# Altium PCB acqboard 3.0.PcbDoc (part 4 of 4)
Units mil, origin at the board's own origin, x right, y up, seen from the top; angles counter-clockwise.
Board outline 6000 x 4000 mil, 4 copper layers (Top Layer, Internal Plane 1, Internal Plane 2, Bottom Layer); 450 components, 328 nets, 1980 pads, 745 vias.
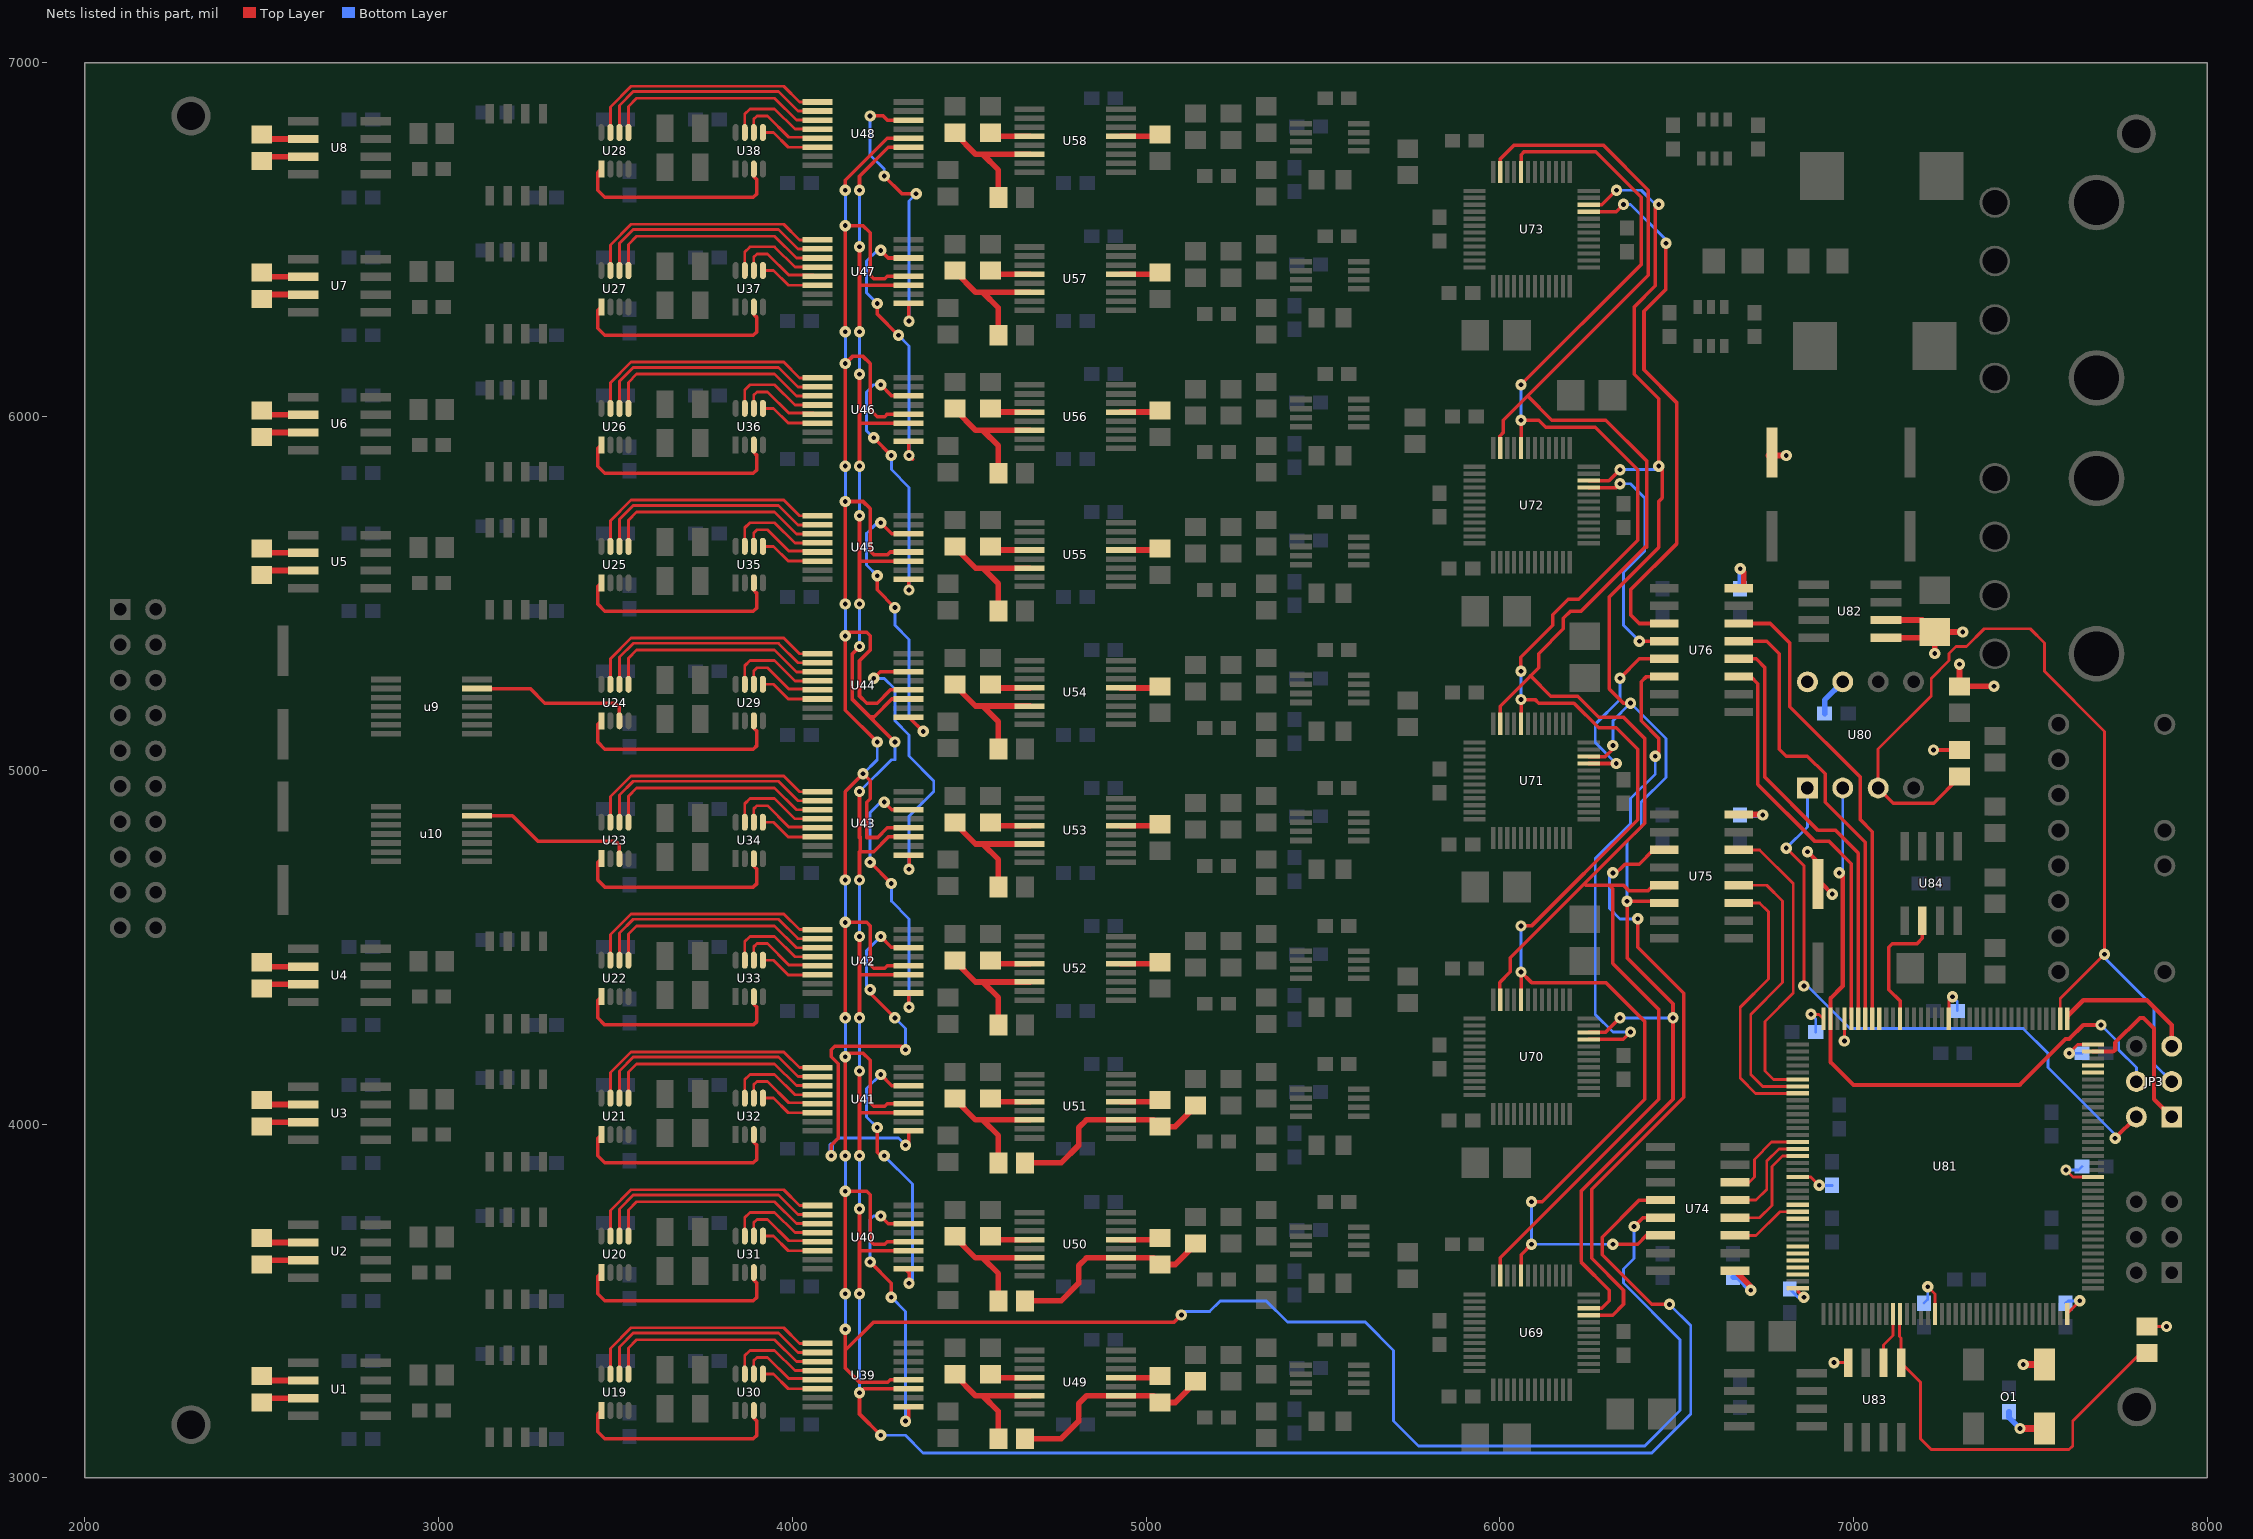
[diagram p6: the nets of this part, all layers, seen from the top]

## Via types
v1: diameter 32, hole 13.5, Top Layer to Bottom Layer, 745 vias

## Nets (pads, with @x,y where several pads share a name; then routed paths per layer and width w, separated by ;. In a path a pad name is that pad's centre, name@x,y a point inside that pad or via, vN(x,y) a via of type N, cw(c..) or ccw(c..) an arc to the next point about the centre after c; other vN are vias at no path point) (continued)
NetR12.AA8_2: R41.2 R59.2 R69.2 U51.11 | length 596.5
  Top Layer w16: R41.2@4657.4,3890 4760,3890 4810,3940 4810,3990 4831.61,4011.61 5020.98,4011.61 R59.2@5040,3992.6 5082.6,3992.6 5140,4050 R69.2@5140,4052.6
NetR12.AA9_2: R39.2 R58.2 R68.2 U50.11 | length 596.5
  Top Layer w16: R39.2@4657.4,3500 4760,3500 4810,3550 4810,3600 4831.61,3621.61 5020.98,3621.61 R58.2@5040,3602.6 5082.6,3602.6 5140,3660 R68.2@5140,3662.6
NetR12.AA10_2: R37.2 R57.2 R67.2 U49.11 | length 596.5
  Top Layer w16: R37.2@4657.4,3110 4760,3110 4810,3160 4810,3210 4831.61,3231.61 5020.98,3231.61 R57.2@5040,3212.6 5082.6,3212.6 5140,3270 R67.2@5140,3272.6
NetR13.AA1_2: R56.2 U58.4 | length 115.1
  Top Layer w16: R56.2@4560,6802.6 4569.8,6792.8 U58.4@4671.06,6792.8
NetR13.AA2_2: R54.2 U57.4 | length 115.1
  Top Layer w16: R54.2@4560,6412.6 4569.8,6402.8 U57.4@4671.06,6402.8
NetR13.AA3_2: R52.2 U56.4 | length 115.1
  Top Layer w16: R52.2@4560,6022.6 4569.8,6012.8 U56.4@4671.06,6012.8
NetR13.AA4_2: R50.2 U55.4 | length 115.1
  Top Layer w16: R50.2@4560,5632.6 4569.8,5622.8 U55.4@4671.06,5622.8
NetR13.AA5_2: R48.2 U54.4 | length 115.1
  Top Layer w16: R48.2@4560,5242.6 4569.8,5232.8 U54.4@4671.06,5232.8
NetR13.AA6_2: R46.2 U53.4 | length 115.1
  Top Layer w16: R46.2@4560,4852.6 4569.8,4842.8 U53.4@4671.06,4842.8
NetR13.AA7_2: R44.2 U52.4 | length 115.1
  Top Layer w16: R44.2@4560,4462.6 4569.8,4452.8 U52.4@4671.06,4452.8
NetR13.AA8_2: R42.2 U51.4 | length 115.1
  Top Layer w16: R42.2@4560,4072.6 4569.8,4062.8 U51.4@4671.06,4062.8
NetR13.AA9_2: R40.2 U50.4 | length 115.1
  Top Layer w16: R40.2@4560,3682.6 4569.8,3672.8 U50.4@4671.06,3672.8
NetR13.AA10_2: R38.2 U49.4 | length 115.1
  Top Layer w16: R38.2@4560,3292.6 4569.8,3282.8 U49.4@4671.06,3282.8
NetR14.AA1_1: R66.1 U58.13 | length 113
  Top Layer w16: U58.13@4928.94,6792.8 5035.39,6792.8 R66.1@5040,6797.4
NetR14.AA2_1: R65.1 U57.13 | length 113
  Top Layer w16: U57.13@4928.94,6402.8 5035.39,6402.8 R65.1@5040,6407.4
NetR14.AA3_1: R64.1 U56.13 | length 113
  Top Layer w16: U56.13@4928.94,6012.8 5035.39,6012.8 R64.1@5040,6017.4
NetR14.AA4_1: R63.1 U55.13 | length 113
  Top Layer w16: U55.13@4928.94,5622.8 5035.39,5622.8 R63.1@5040,5627.4
NetR14.AA5_1: R62.1 U54.13 | length 113
  Top Layer w16: U54.13@4928.94,5232.8 5035.39,5232.8 R62.1@5040,5237.4
NetR14.AA6_1: R61.1 U53.13 | length 113
  Top Layer w16: U53.13@4928.94,4842.8 5035.39,4842.8 R61.1@5040,4847.4
NetR14.AA7_1: R60.1 U52.13 | length 113
  Top Layer w16: U52.13@4928.94,4452.8 5035.39,4452.8 R60.1@5040,4457.4
NetR14.AA8_1: R59.1 U51.13 | length 113
  Top Layer w16: U51.13@4928.94,4062.8 5035.39,4062.8 R59.1@5040,4067.4
NetR14.AA9_1: R58.1 U50.13 | length 113
  Top Layer w16: U50.13@4928.94,3672.8 5035.39,3672.8 R58.1@5040,3677.4
NetR14.AA10_1: R57.1 U49.13 | length 113
  Top Layer w16: U49.13@4928.94,3282.8 5035.39,3282.8 R57.1@5040,3287.4
NetR15.AA1_2: R36.2 R55.1 U58.6 | length 377.8
  Top Layer w16: R36.2@4460,6802.6 4460,6800 4518.39,6741.61 U58.6@4671.06,6741.61 ; 4538.39,6741.61 4582.6,6697.4 R55.1@4582.6,6620
NetR15.AA2_2: R34.2 R53.1 U57.6 | length 377.8
  Top Layer w16: R34.2@4460,6412.6 4460,6410 4518.39,6351.61 U57.6@4671.06,6351.62 ; 4538.39,6351.61 4582.6,6307.4 R53.1@4582.6,6230
NetR15.AA3_2: R32.2 R51.1 U56.6 | length 377.8
  Top Layer w16: R32.2@4460,6022.6 4460,6020 4518.39,5961.61 U56.6@4671.06,5961.62 ; 4538.39,5961.61 4582.6,5917.4 R51.1@4582.6,5840
NetR15.AA4_2: R30.2 R49.1 U55.6 | length 377.8
  Top Layer w16: R30.2@4460,5632.6 4460,5630 4518.39,5571.61 U55.6@4671.06,5571.62 ; 4538.39,5571.61 4582.6,5527.4 R49.1@4582.6,5450
NetR15.AA5_2: R28.2 R47.1 U54.6 | length 377.8
  Top Layer w16: R28.2@4460,5242.6 4460,5240 4518.39,5181.61 U54.6@4671.06,5181.62 ; 4538.39,5181.61 4582.6,5137.4 R47.1@4582.6,5060
NetR15.AA6_2: R26.2 R45.1 U53.6 | length 377.8
  Top Layer w16: R26.2@4460,4852.6 4460,4850 4518.39,4791.61 U53.6@4671.06,4791.62 ; 4538.39,4791.61 4582.6,4747.4 R45.1@4582.6,4670
NetR15.AA7_2: R24.2 R43.1 U52.6 | length 377.8
  Top Layer w16: R24.2@4460,4462.6 4460,4460 4518.39,4401.61 U52.6@4671.06,4401.62 ; 4538.39,4401.61 4582.6,4357.4 R43.1@4582.6,4280
NetR15.AA8_2: R22.2 R41.1 U51.6 | length 377.8
  Top Layer w16: R22.2@4460,4072.6 4460,4070 4518.39,4011.61 U51.6@4671.06,4011.62 ; 4538.39,4011.61 4582.6,3967.4 R41.1@4582.6,3890
NetR15.AA9_2: R20.2 R39.1 U50.6 | length 377.8
  Top Layer w16: R20.2@4460,3682.6 4460,3680 4518.39,3621.61 U50.6@4671.06,3621.62 ; 4538.39,3621.61 4582.6,3577.4 R39.1@4582.6,3500
NetR15.AA10_2: R18.2 R37.1 U49.6 | length 377.8
  Top Layer w16: R18.2@4460,3292.6 4460,3290 4518.39,3231.61 U49.6@4671.06,3231.62 ; 4538.39,3231.61 4582.6,3187.4 R37.1@4582.6,3110
NetR18.IN1_1: R8.1 U8.2 | length 122.8
  Top Layer w16: R8.1@2500,6797.4 2512.4,6785 U8.2@2617.64,6785
NetR18.IN1_2: R8.2 U8.3 | length 122.8
  Top Layer w16: R8.2@2500,6722.6 2512.4,6735 U8.3@2617.64,6735
NetR18.IN2_1: R7.1 U7.2 | length 122.8
  Top Layer w16: R7.1@2500,6407.4 2512.4,6395 U7.2@2617.64,6395
NetR18.IN2_2: R7.2 U7.3 | length 122.8
  Top Layer w16: R7.2@2500,6332.6 2512.4,6345 U7.3@2617.64,6345
NetR18.IN3_1: R6.1 U6.2 | length 122.8
  Top Layer w16: R6.1@2500,6017.4 2512.4,6005 U6.2@2617.64,6005
NetR18.IN3_2: R6.2 U6.3 | length 122.8
  Top Layer w16: R6.2@2500,5942.6 2512.4,5955 U6.3@2617.64,5955
NetR18.IN4_1: R5.1 U5.2 | length 122.8
  Top Layer w16: R5.1@2500,5627.4 2512.4,5615 U5.2@2617.64,5615
NetR18.IN4_2: R5.2 U5.3 | length 122.8
  Top Layer w16: R5.2@2500,5552.6 2512.4,5565 U5.3@2617.64,5565
NetR18.IN5_1: R4.1 U4.2 | length 122.8
  Top Layer w16: R4.1@2500,4457.4 2512.4,4445 U4.2@2617.64,4445
NetR18.IN5_2: R4.2 U4.3 | length 122.8
  Top Layer w16: R4.2@2500,4382.6 2512.4,4395 U4.3@2617.64,4395
NetR18.IN6_1: R3.1 U3.2 | length 122.8
  Top Layer w16: R3.1@2500,4067.4 2512.4,4055 U3.2@2617.64,4055
NetR18.IN6_2: R3.2 U3.3 | length 122.8
  Top Layer w16: R3.2@2500,3992.6 2512.4,4005 U3.3@2617.64,4005
NetR18.IN7_1: R2.1 U2.2 | length 122.8
  Top Layer w16: R2.1@2500,3677.4 2512.4,3665 U2.2@2617.64,3665
NetR18.IN7_2: R2.2 U2.3 | length 122.8
  Top Layer w16: R2.2@2500,3602.6 2512.4,3615 U2.3@2617.64,3615
NetR18.IN8_1: R1.1 U1.2 | length 122.8
  Top Layer w16: R1.1@2500,3287.4 2512.4,3275 U1.2@2617.64,3275
NetR18.IN8_2: R1.2 U1.3 | length 122.8
  Top Layer w16: R1.2@2500,3212.6 2512.4,3225 U1.3@2617.64,3225
NetR20_1: R119.1 U81.12 U83.5 | length 1190.9
  Top Layer w8: U81.12@7130,3470 7130,3400 7135,3395 U83.5@7135,3325.32 ; U83.5@7135,3325 7190,3270 7190,3110 7220,3080 7610,3080 7620,3090 7620,3160 7812.6,3352.6 R119.1@7830,3352.6
NetU1.ADC1_22: U69.22 U70.22 U71.22 U72.22 U73.22 U75.6 | length 4658
  Top Layer w10: U69.22@6251.42,3478.9 6288.9,3478.9 6310,3500 6310,3530 6230,3610 6230,3810 6490,4070 6490,4340 6360,4470 v1(6360,4630) 6459.68,4630 U75.6@6464.68,4625 ; U70.22@6251.42,4258.9 6298.9,4258.9 v1(6340,4300) ; U71.22@6251.42,5038.9 6298.9,5038.9 6320,5060 v1(6320,5070) ; U72.22@6251.42,5818.9 6308.9,5818.9 v1(6340,5850) ; U73.22@6251.42,6598.9 6288.9,6598.9 v1(6330,6640) ; v1(6370,5190) 6350,5190 6310,5230 6310,5490 6450,5630 6450,5760 6460,5770 6460,5860 v1@6450,5870 ; v1(6450,5860) 6450,6050 6380,6120 6380,6310 6440,6370 6440,6590 v1(6450,6600)
  Bottom Layer w8: v1(6320,5070) 6320,5140 v1(6370,5190) 6470,5090 6470,4980 6400,4910 6400,4840 6360,4800 v1(6360,4630) ; v1(6330,6640) 6400,6640 6440,6600 v1(6450,6600) ; v1(6340,4300) v1(6490,4300) ; v1(6340,5850) 6440,5850 v1(6450,5860)
NetU1.ADC1_32: U69.32 U70.32 U71.32 U72.32 U73.32 U74.14 | length 5480.1
  Top Layer w10: v1(6060,4430) 6090,4400 6300,4400 6410,4290 6410,4070 6120,3780 v1(6090,3780) ; v1(6060,4560) 6090,4560 6390,4860 6390,5060 6330,5120 6280,5120 6210,5190 6110,5190 6100,5200 v1(6060,5200) 6060.47,5199.53 U71.32@6060.47,5131.42 ; v1(6060,5280) 6060,5320 6150,5410 6150,5440 6193.34,5483.34 6223.34,5483.34 6390,5650 6390,5850 6270,5970 6130,5970 6110,5990 v1(6060,5990) 6060.47,5989.53 U72.32@6060.47,5911.42 ; v1(6060,6090) 6400,6430 6400,6620 6271.49,6748.51 6068.51,6748.51 6060.47,6740.47 U73.32@6060.47,6691.42 ; U69.32@6060.47,3571.42 6060.47,3630.47 v1(6090,3660) v1@6090,3670 ; U70.32@6060.47,4351.42 v1@6060.47,4429.53 ; v1(6320,3660) 6390,3660 6415,3685 U74.14@6454.69,3685
  Bottom Layer w8: v1(6060,4430) v1(6060,4560) ; v1(6060,5200) v1(6060,5280) ; v1(6060,5990) v1(6060,6090) ; v1(6090,3780) v1(6090,3660) v1(6320,3660)
NetU1.ADC1_35: U69.35 U70.35 U71.35 U72.35 U73.35 U75.5 | length 5638
  Top Layer w10: U70.35@6000,4380 6000,4400 6030,4430 6030,4470 6410,4850 6410,5090 6350,5150 6280,5150 6220.43,5209.57 6144.6,5209.57 6087.09,5267.09 ; U72.35@6000,5911.42 6000,5944.91 6010,5954.91 6010,5990 6420,6400 6420,6640 6292.29,6767.71 6040.77,6767.71 6001.42,6728.36 U73.35@6001.42,6691.42 ; U69.35@6001.42,3571.42 6001.42,3621.42 6450,4070 6450,4323.87 6320,4453.87 6320,4665 6310,4675 ; U71.35@6001.42,5131.42 6001.42,5181.42 6110,5290 6110,5330 6180,5400 6180,5430 6200,5450 6230,5450 6410,5630 6415.36,5630 6415.36,5874.64 6300,5990 6147.62,5990 6078.81,6058.81 ; 6239.8,4679.08 6243.87,4675 6350,4675 6365,4660 6420,4660 6435,4675 U75.5@6464.68,4675
NetU2_11: U81.11 U83.6 | length 148.7
  Top Layer w8: U83.6@7085,3325.32 7085,3375 7112.36,3402.36 U81.11@7112.36,3462.68
NetU2_68: U81.68
NetU2_69: U81.69
NetU2_97: U81.97 U84.2 | length 371
  Top Layer w10: U81.97@7132.05,4297.32 7132.05,4347.95 7100,4380 7100,4500 7110,4510 7180,4510 7195,4525 U84.2@7195,4574.69
NetU2_100: U81.100
NetU2_101: U76.14 U81.101 | length 1326.8
  Top Layer w10: U76.14@6675.31,5415 6765,5415 6820,5360 6820,5180 7020,4980 7020,4860 7053.31,4826.69 U81.101@7053.31,4297.32
NetU2_102: U76.13 U81.102 | length 1297.9
  Top Layer w10: U76.13@6675.31,5365 6755,5365 6790,5330 6790,5060 6810,5040 6870,5040 6920,4990 6920,4910 7033.62,4796.38 U81.102@7033.62,4297.32
NetU2_103: U76.12 U81.103 | length 1216.3
  Top Layer w10: U76.12@6675.31,5315 6725,5315 6750,5290 6750,4980 6900,4830 6950,4830 7013.94,4766.06 U81.103@7013.94,4297.32
NetU2_104: U76.11 U81.104 | length 1143.5
  Top Layer w10: U76.11@6675.31,5265 6710,5265 6730,5245 6730,4960 6890,4800 6930,4800 6994.25,4735.75 U81.104@6994.25,4297.32
NetU2_114: U75.14 U81.114 | length 859.8
  Top Layer w8: U75.14@6675.31,4775 6735,4775 6830,4680 6830,4370 6750,4290 6750,4150 6773.94,4126.06 U81.114@6842.68,4126.06
NetU2_115: U75.12 U81.115 | length 817.2
  Top Layer w8: U75.12@6675.31,4675 6755,4675 6800,4630 6800,4400 6710,4310 6710,4140 6743.62,4106.38 U81.115@6842.68,4106.38
NetU2_116: U75.11 U81.116 | length 778.8
  Top Layer w8: U75.11@6675.31,4625 6735,4625 6760,4600 6760,4410 6680,4330 6680,4130 6723.31,4086.69 U81.116@6842.68,4086.69
NetU2_123: U74.6 U81.123 | length 253.8
  Top Layer w8: U74.6@6665.32,3835 6705,3835 6720,3850 6720,3900 6768.9,3948.9 U81.123@6842.68,3948.9
NetU2_124: U74.5 U81.124 | length 284
  Top Layer w8: U74.5@6665.32,3785 6725,3785 6755,3815 6755,3895 6789.21,3929.21 U81.124@6842.68,3929.21
NetU2_125: U74.4 U81.125 | length 314.1
  Top Layer w8: U74.4@6665.32,3735 6735,3735 6770,3770 6770,3880 6799.53,3909.53 U81.125@6842.68,3909.53
NetU2_132: U81.132
NetU2_133: U74.3 U81.133 | length 205.1
  Top Layer w8: U74.3@6665.32,3685 6725,3685 6792.05,3752.05 U81.133@6842.68,3752.05
NetU2_134: U81.134
NetU2_138: U81.138
NetU2_139: U81.139
NetU2_140: U81.140
NetU2_141: U81.141
NetU2_142: U81.142
NetU6.PGA1_1: U28.1 U38.3 | length 600.2
  Top Layer w10: U28.1@3460,6700 3450,6690 3450,6640 3470,6620 3690,6620 3890,6620 3900,6630 3900,6670 3891.18,6678.82 U38.3@3891.18,6700
NetU6.PGA1_5: U28.5 U48.3 | length 643.1
  Top Layer w8: U28.5@3536.77,6803.15 3536.77,6876.77 3560,6900 3950,6900 4011.61,6838.39 U48.3@4071.06,6838.39
NetU6.PGA1_6: U28.6 U48.2 | length 675.7
  Top Layer w8: U28.6@3511.18,6803.15 3511.18,6879.97 3550.21,6919 3961,6919 4016.02,6863.98 U48.2@4071.06,6863.98
NetU6.PGA1_7: U28.7 U48.1 | length 700.5
  Top Layer w8: U28.7@3485.59,6803.15 3485.59,6875.59 3544,6934 3976,6934 4020.43,6889.57 U48.1@4071.06,6889.57
NetU6.PGA2_1: U27.1 U37.3 | length 600.2
  Top Layer w10: U27.1@3460,6310 3450,6300 3450,6250 3470,6230 3690,6230 3890,6230 3900,6240 3900,6280 3891.18,6288.82 U37.3@3891.18,6310
NetU6.PGA2_5: U27.5 U47.3 | length 643.1
  Top Layer w8: U27.5@3536.77,6413.15 3536.77,6486.77 3560,6510 3950,6510 4011.61,6448.39 U47.3@4071.06,6448.39
NetU6.PGA2_6: U27.6 U47.2 | length 675.7
  Top Layer w8: U27.6@3511.18,6413.15 3511.18,6489.97 3550.21,6529 3961,6529 4016.02,6473.98 U47.2@4071.06,6473.98
NetU6.PGA2_7: U27.7 U47.1 | length 700.5
  Top Layer w8: U27.7@3485.59,6413.15 3485.59,6485.59 3544,6544 3976,6544 4020.43,6499.57 U47.1@4071.06,6499.57
NetU6.PGA3_1: U26.1 U36.3 | length 600.2
  Top Layer w10: U26.1@3460,5920 3450,5910 3450,5860 3470,5840 3690,5840 3890,5840 3900,5850 3900,5890 3891.18,5898.82 U36.3@3891.18,5920
NetU6.PGA3_5: U26.5 U46.3 | length 643.1
  Top Layer w8: U26.5@3536.77,6023.15 3536.77,6096.77 3560,6120 3950,6120 4011.61,6058.39 U46.3@4071.06,6058.39
NetU6.PGA3_6: U26.6 U46.2 | length 675.7
  Top Layer w8: U26.6@3511.18,6023.15 3511.18,6099.97 3550.21,6139 3961,6139 4016.02,6083.98 U46.2@4071.06,6083.98
NetU6.PGA3_7: U26.7 U46.1 | length 700.5
  Top Layer w8: U26.7@3485.59,6023.15 3485.59,6095.59 3544,6154 3976,6154 4020.43,6109.57 U46.1@4071.06,6109.57
NetU6.PGA4_1: U25.1 U35.3 | length 600.2
  Top Layer w10: U25.1@3460,5530 3450,5520 3450,5470 3470,5450 3690,5450 3890,5450 3900,5460 3900,5500 3891.18,5508.82 U35.3@3891.18,5530
NetU6.PGA4_5: U25.5 U45.3 | length 643.1
  Top Layer w8: U25.5@3536.77,5633.15 3536.77,5706.77 3560,5730 3950,5730 4011.61,5668.39 U45.3@4071.06,5668.39
NetU6.PGA4_6: U25.6 U45.2 | length 675.7
  Top Layer w8: U25.6@3511.18,5633.15 3511.18,5709.97 3550.21,5749 3961,5749 4016.02,5693.98 U45.2@4071.06,5693.98
NetU6.PGA4_7: U25.7 U45.1 | length 700.5
  Top Layer w8: U25.7@3485.59,5633.15 3485.59,5705.59 3544,5764 3976,5764 4020.43,5719.57 U45.1@4071.06,5719.57
NetU6.PGA5_1: U24.1 U29.3 | length 600.2
  Top Layer w10: U24.1@3460,5140 3450,5130 3450,5080 3470,5060 3690,5060 3890,5060 3900,5070 3900,5110 3891.18,5118.82 U29.3@3891.18,5140
NetU6.PGA5_5: U24.5 U44.3 | length 643.1
  Top Layer w8: U24.5@3536.77,5243.15 3536.77,5316.77 3560,5340 3950,5340 4011.61,5278.39 U44.3@4071.06,5278.39
NetU6.PGA5_6: U24.6 U44.2 | length 675.7
  Top Layer w8: U24.6@3511.18,5243.15 3511.18,5319.97 3550.21,5359 3961,5359 4016.02,5303.98 U44.2@4071.06,5303.98
NetU6.PGA5_7: U24.7 U44.1 | length 700.5
  Top Layer w8: U24.7@3485.59,5243.15 3485.59,5315.59 3544,5374 3976,5374 4020.43,5329.57 U44.1@4071.06,5329.57
NetU6.PGA6_1: U23.1 U34.3 | length 600.2
  Top Layer w10: U23.1@3460,4750 3450,4740 3450,4690 3470,4670 3690,4670 3890,4670 3900,4680 3900,4720 3891.18,4728.82 U34.3@3891.18,4750
NetU6.PGA6_5: U23.5 U43.3 | length 643.1
  Top Layer w8: U23.5@3536.77,4853.15 3536.77,4926.77 3560,4950 3950,4950 4011.61,4888.39 U43.3@4071.06,4888.39
NetU6.PGA6_6: U23.6 U43.2 | length 675.7
  Top Layer w8: U23.6@3511.18,4853.15 3511.18,4929.97 3550.21,4969 3961,4969 4016.02,4913.98 U43.2@4071.06,4913.98
NetU6.PGA6_7: U23.7 U43.1 | length 700.5
  Top Layer w8: U23.7@3485.59,4853.15 3485.59,4925.59 3544,4984 3976,4984 4020.43,4939.57 U43.1@4071.06,4939.57
NetU6.PGA7_1: U22.1 U33.3 | length 600.2
  Top Layer w10: U22.1@3460,4360 3450,4350 3450,4300 3470,4280 3690,4280 3890,4280 3900,4290 3900,4330 3891.18,4338.82 U33.3@3891.18,4360
NetU6.PGA7_5: U22.5 U42.3 | length 643.1
  Top Layer w8: U22.5@3536.77,4463.15 3536.77,4536.77 3560,4560 3950,4560 4011.61,4498.39 U42.3@4071.06,4498.39
NetU6.PGA7_6: U22.6 U42.2 | length 675.7
  Top Layer w8: U22.6@3511.18,4463.15 3511.18,4539.97 3550.21,4579 3961,4579 4016.02,4523.98 U42.2@4071.06,4523.98
NetU6.PGA7_7: U22.7 U42.1 | length 700.5
  Top Layer w8: U22.7@3485.59,4463.15 3485.59,4535.59 3544,4594 3976,4594 4020.43,4549.57 U42.1@4071.06,4549.57
NetU6.PGA8_1: U21.1 U32.3 | length 600.2
  Top Layer w10: U21.1@3460,3970 3450,3960 3450,3910 3470,3890 3690,3890 3890,3890 3900,3900 3900,3940 3891.18,3948.82 U32.3@3891.18,3970
NetU6.PGA8_5: U21.5 U41.3 | length 643.1
  Top Layer w8: U21.5@3536.77,4073.15 3536.77,4146.77 3560,4170 3950,4170 4011.61,4108.39 U41.3@4071.06,4108.39
NetU6.PGA8_6: U21.6 U41.2 | length 675.7
  Top Layer w8: U21.6@3511.18,4073.15 3511.18,4149.97 3550.21,4189 3961,4189 4016.02,4133.98 U41.2@4071.06,4133.98
NetU6.PGA8_7: U21.7 U41.1 | length 700.5
  Top Layer w8: U21.7@3485.59,4073.15 3485.59,4145.59 3544,4204 3976,4204 4020.43,4159.57 U41.1@4071.06,4159.57
NetU6.PGA9_1: U20.1 U31.3 | length 600.2
  Top Layer w10: U20.1@3460,3580 3450,3570 3450,3520 3470,3500 3690,3500 3890,3500 3900,3510 3900,3550 3891.18,3558.82 U31.3@3891.18,3580
NetU6.PGA9_5: U20.5 U40.3 | length 643.1
  Top Layer w8: U20.5@3536.77,3683.15 3536.77,3756.77 3560,3780 3950,3780 4011.61,3718.39 U40.3@4071.06,3718.39
NetU6.PGA9_6: U20.6 U40.2 | length 675.7
  Top Layer w8: U20.6@3511.18,3683.15 3511.18,3759.97 3550.21,3799 3961,3799 4016.02,3743.98 U40.2@4071.06,3743.98
NetU6.PGA9_7: U20.7 U40.1 | length 700.5
  Top Layer w8: U20.7@3485.59,3683.15 3485.59,3755.59 3544,3814 3976,3814 4020.43,3769.57 U40.1@4071.06,3769.57
NetU6.PGA10_1: U19.1 U30.3 | length 600.2
  Top Layer w10: U19.1@3460,3190 3450,3180 3450,3130 3470,3110 3690,3110 3890,3110 3900,3120 3900,3160 3891.18,3168.82 U30.3@3891.18,3190
NetU6.PGA10_5: U19.5 U39.3 | length 643.1
  Top Layer w8: U19.5@3536.77,3293.15 3536.77,3366.77 3560,3390 3950,3390 4011.61,3328.39 U39.3@4071.06,3328.39
NetU6.PGA10_6: U19.6 U39.2 | length 675.7
  Top Layer w8: U19.6@3511.18,3293.15 3511.18,3369.97 3550.21,3409 3961,3409 4016.02,3353.98 U39.2@4071.06,3353.98
NetU6.PGA10_7: U19.7 U39.1 | length 700.5
  Top Layer w8: U19.7@3485.59,3293.15 3485.59,3365.59 3544,3424 3976,3424 4020.43,3379.57 U39.1@4071.06,3379.57
NetU7.PGA1_5: U38.5 U48.6 | length 171.5
  Top Layer w8: U38.5@3916.77,6803.15 3946.85,6803.15 3988.39,6761.61 U48.6@4071.06,6761.61
NetU7.PGA1_6: U38.6 U48.5 | length 235.4
  Top Layer w8: U38.6@3891.18,6803.15 3891.18,6841.18 3900,6850 3930,6850 3990,6790 U48.5@4060,6790
NetU7.PGA1_7: U38.7 U48.4 | length 287.6
  Top Layer w8: U38.7@3865.59,6803.15 3865.59,6855.59 3880,6870 3950,6870 4007.21,6812.8 U48.4@4071.06,6812.8
NetU7.PGA2_5: U37.5 U47.6 | length 171.5
  Top Layer w8: U37.5@3916.77,6413.15 3946.85,6413.15 3988.39,6371.61 U47.6@4071.06,6371.61
NetU7.PGA2_6: U37.6 U47.5 | length 235.4
  Top Layer w8: U37.6@3891.18,6413.15 3891.18,6451.18 3900,6460 3930,6460 3990,6400 U47.5@4060,6400
NetU7.PGA2_7: U37.7 U47.4 | length 287.6
  Top Layer w8: U37.7@3865.59,6413.15 3865.59,6465.59 3880,6480 3950,6480 4007.21,6422.8 U47.4@4071.06,6422.8
NetU7.PGA3_5: U36.5 U46.6 | length 171.5
  Top Layer w8: U36.5@3916.77,6023.15 3946.85,6023.15 3988.39,5981.61 U46.6@4071.06,5981.61
NetU7.PGA3_6: U36.6 U46.5 | length 235.4
  Top Layer w8: U36.6@3891.18,6023.15 3891.18,6061.18 3900,6070 3930,6070 3990,6010 U46.5@4060,6010
NetU7.PGA3_7: U36.7 U46.4 | length 287.6
  Top Layer w8: U36.7@3865.59,6023.15 3865.59,6075.59 3880,6090 3950,6090 4007.21,6032.8 U46.4@4071.06,6032.8
NetU7.PGA4_5: U35.5 U45.6 | length 171.5
  Top Layer w8: U35.5@3916.77,5633.15 3946.85,5633.15 3988.39,5591.61 U45.6@4071.06,5591.61
NetU7.PGA4_6: U35.6 U45.5 | length 235.4
  Top Layer w8: U35.6@3891.18,5633.15 3891.18,5671.18 3900,5680 3930,5680 3990,5620 U45.5@4060,5620
NetU7.PGA4_7: U35.7 U45.4 | length 287.6
  Top Layer w8: U35.7@3865.59,5633.15 3865.59,5685.59 3880,5700 3950,5700 4007.21,5642.8 U45.4@4071.06,5642.8
NetU7.PGA5_5: U29.5 U44.6 | length 171.5
  Top Layer w8: U29.5@3916.77,5243.15 3946.85,5243.15 3988.39,5201.61 U44.6@4071.06,5201.61
NetU7.PGA5_6: U29.6 U44.5 | length 235.4
  Top Layer w8: U29.6@3891.18,5243.15 3891.18,5281.18 3900,5290 3930,5290 3990,5230 U44.5@4060,5230
NetU7.PGA5_7: U29.7 U44.4 | length 287.6
  Top Layer w8: U29.7@3865.59,5243.15 3865.59,5295.59 3880,5310 3950,5310 4007.21,5252.8 U44.4@4071.06,5252.8
NetU7.PGA6_5: U34.5 U43.6 | length 171.5
  Top Layer w8: U34.5@3916.77,4853.15 3946.85,4853.15 3988.39,4811.61 U43.6@4071.06,4811.61
NetU7.PGA6_6: U34.6 U43.5 | length 235.4
  Top Layer w8: U34.6@3891.18,4853.15 3891.18,4891.18 3900,4900 3930,4900 3990,4840 U43.5@4060,4840
NetU7.PGA6_7: U34.7 U43.4 | length 287.6
  Top Layer w8: U34.7@3865.59,4853.15 3865.59,4905.59 3880,4920 3950,4920 4007.21,4862.8 U43.4@4071.06,4862.8
NetU7.PGA7_5: U33.5 U42.6 | length 171.5
  Top Layer w8: U33.5@3916.77,4463.15 3946.85,4463.15 3988.39,4421.61 U42.6@4071.06,4421.61
NetU7.PGA7_6: U33.6 U42.5 | length 235.4
  Top Layer w8: U33.6@3891.18,4463.15 3891.18,4501.18 3900,4510 3930,4510 3990,4450 U42.5@4060,4450
NetU7.PGA7_7: U33.7 U42.4 | length 287.6
  Top Layer w8: U33.7@3865.59,4463.15 3865.59,4515.59 3880,4530 3950,4530 4007.21,4472.8 U42.4@4071.06,4472.8
NetU7.PGA8_5: U32.5 U41.6 | length 171.5
  Top Layer w8: U32.5@3916.77,4073.15 3946.85,4073.15 3988.39,4031.61 U41.6@4071.06,4031.61
NetU7.PGA8_6: U32.6 U41.5 | length 235.4
  Top Layer w8: U32.6@3891.18,4073.15 3891.18,4111.18 3900,4120 3930,4120 3990,4060 U41.5@4060,4060
NetU7.PGA8_7: U32.7 U41.4 | length 287.6
  Top Layer w8: U32.7@3865.59,4073.15 3865.59,4125.59 3880,4140 3950,4140 4007.21,4082.8 U41.4@4071.06,4082.8
NetU7.PGA9_5: U31.5 U40.6 | length 171.5
  Top Layer w8: U31.5@3916.77,3683.15 3946.85,3683.15 3988.39,3641.61 U40.6@4071.06,3641.61
NetU7.PGA9_6: U31.6 U40.5 | length 235.4
  Top Layer w8: U31.6@3891.18,3683.15 3891.18,3721.18 3900,3730 3930,3730 3990,3670 U40.5@4060,3670
NetU7.PGA9_7: U31.7 U40.4 | length 287.6
  Top Layer w8: U31.7@3865.59,3683.15 3865.59,3735.59 3880,3750 3950,3750 4007.21,3692.8 U40.4@4071.06,3692.8
NetU7.PGA10_5: U30.5 U39.6 | length 171.5
  Top Layer w8: U30.5@3916.77,3293.15 3946.85,3293.15 3988.39,3251.61 U39.6@4071.06,3251.61
NetU7.PGA10_6: U30.6 U39.5 | length 235.4
  Top Layer w8: U30.6@3891.18,3293.15 3891.18,3331.18 3900,3340 3930,3340 3990,3280 U39.5@4060,3280
NetU7.PGA10_7: U30.7 U39.4 | length 287.6
  Top Layer w8: U30.7@3865.59,3293.15 3865.59,3345.59 3880,3360 3950,3360 4007.21,3302.8 U39.4@4071.06,3302.8
NetU14_12: U39.11 U40.11 U41.11 U42.11 U43.11 U44.11 U45.11 U46.11 U47.11 U48.11 U74.12 | length 8328.8
  Top Layer w10: v1(4190,3520) v1(4190,3760) ; 4190,3640 4191.61,3641.61 U40.11@4328.94,3641.61 ; v1(4190,3910) v1(4190,4150) ; 4190,4030 4191.61,4031.61 U41.11@4328.94,4031.61 ; v1(4190,4300) v1(4190,4530) ; 4190,4420 4191.61,4421.61 U42.11@4328.94,4421.61 ; v1(4190,4690) 4190,4770 4230,4770 4271.61,4811.61 U43.11@4328.94,4811.61 ; v1(4190,4940) 4190,4810 4191.61,4811.61 4191.61,4771.61 ; v1(4190,5350) 4170,5330 4170,5200 v1(4290,5080) ; v1(4190,5470) v1(4190,5720) ; 4190,5590 4191.61,5591.61 U45.11@4328.94,5591.61 ; v1(4190,5860) v1(4190,6120) ; v1(4190,6240) v1(4190,6480) ; 4190,6370 4191.61,6371.61 U47.11@4328.94,6371.61 ; v1(4190,6640) 4190,6680 4271.61,6761.61 U48.11@4328.94,6761.61 ; 4191.61,5981.61 U46.11@4328.94,5981.61 ; 4218.69,5151.31 4231.31,5151.31 4281.61,5201.61 U44.11@4328.94,5201.61 ; v1(4250,3120) 4190,3180 v1(4190,3240) 4201.61,3251.61 U39.11@4328.94,3251.61 ; U74.12@6454.69,3785 6395,3785 6290,3680 6290,3630 6430,3490 v1(6480,3490)
  Bottom Layer w8: v1(4190,3240) v1(4190,3520) ; v1(4190,3760) v1(4190,3910) ; v1(4190,4150) v1(4190,4300) ; v1(4190,4530) v1(4190,4690) ; v1(4190,4940) 4280,5030 4290,5030 v1(4290,5080) ; v1(4190,5350) v1(4190,5470) ; v1(4190,5720) v1(4190,5860) ; v1(4190,6120) v1(4190,6240) ; v1(4190,6480) v1(4190,6640) ; v1(4250,3120) 4320,3120 4370,3070 6430,3070 6540,3180 6540,3430 v1(6480,3490)
NetU14_13: U39.12 U40.12 U41.12 U42.12 U43.12 U44.12 U45.12 U46.12 U47.12 U48.12 U74.13 | length 9950.2
  Top Layer w10: 4150,3360 4230,3440 5080,3440 v1(5100,3460) ; v1(4150,3420) 4150,3310 4190,3270 4270,3270 4277.21,3277.21 U39.12@4328.94,3277.21 ; v1(4150,3520) v1(4150,3810) 4210,3810 4220,3800 4220,3670 4230,3660 4261.36,3660 4268.57,3667.21 U40.12@4328.94,3667.21 ; v1(4150,3910) v1(4150,4190) 4160,4200 4200,4200 4220,4180 4220,4060 4230,4050 4261.36,4050 4268.57,4057.21 U41.12@4328.94,4057.21 ; v1(4150,4300) v1(4150,4570) 4210,4570 4220,4560 4220,4450 4230,4440 4261.36,4440 4268.57,4447.21 U42.12@4328.94,4447.21 ; v1(4150,4690) 4150,4940 v1(4200,4990) 4220,4970 4220,4920 4210,4910 4210,4810 4241.36,4810 4268.57,4837.21 U43.12@4328.94,4837.21 ; v1(4150,5470) v1(4150,5760) 4200,5760 4220,5740 4220,5620 4230,5610 4270,5610 4277.21,5617.21 U45.12@4328.94,5617.21 ; v1(4150,5860) v1(4150,6150) 4170,6170 4200,6170 4220,6150 4220,6020 4240,6000 4261.36,6000 4268.57,6007.21 U46.12@4328.94,6007.21 ; v1(4150,6240) v1(4150,6540) 4200,6540 4220,6520 4220,6400 4230,6390 4261.36,6390 4268.57,6397.21 U47.12@4328.94,6397.21 ; v1(4150,6640) 4150,6668.64 4268.57,6787.21 U48.12@4328.94,6787.21 ; v1(4240,5080) 4150,5170 v1(4150,5380) 4160,5390 4210,5390 4220,5380 4220,5340 4190,5310 4190,5210 4210,5190 4240,5190 4277.21,5227.21 U44.12@4328.94,5227.21 ; v1@6380,3700 v1(6380,3710) 6405,3735 U74.13@6454.69,3735
  Bottom Layer w8: v1(4150,3420) v1(4150,3520) ; v1(4150,3810) v1(4150,3910) ; v1(4150,4190) v1(4150,4300) ; v1(4150,4570) v1(4150,4690) ; v1(4150,5380) v1(4150,5470) ; v1(4150,5760) v1(4150,5860) ; v1(4150,6150) v1(4150,6240) ; v1(4150,6540) v1(4150,6640) ; v1(4200,4990) 4240,5030 v1(4240,5080) ; v1(5100,3460) 5110,3470 5180,3470 5210,3500 5340,3500 5400,3440 5620,3440 5700,3360 5700,3160 5770,3090 6410,3090 6510,3190 6510,3390 6350,3550 6350,3590 6380,3620 v1(6380,3710)
PGAIN5: u9.6 U24.3 | length 552.8
  Top Layer w10: u9.6@3108.94,5231.18 3258.82,5231.18 3300,5190 3500,5190 ; 3410,5190 3500,5190 ; U24.3@3511.18,5140 3511.18,5178.82 3500,5190
PGAIN6: u10.6 U23.3 | length 475.2
  Top Layer w10: u10.6@3108.94,4871.18 3208.82,4871.18 3280,4800 3500,4800 3511.18,4788.82 U23.3@3511.18,4750
SCLK: JP3.4 U80.2 U81.107 | length 1861.4
  Top Layer w12: v1(6960,4710) 6970,4700 6970,4390 6935.2,4355.2 6935.2,4174.8 7000,4110 7470,4110 7600,4240 7610,4240 7650,4280 v1(7700,4280)
  Bottom Layer w8: v1(6960,4710) 6970,4720 U80.2@6970,4950 ; v1(7700,4280) 7750,4230 7750,4210 7800,4160 JP3.4@7800,4120
SDIN: JP3.2 U80.1 U81.105 | length 1925.6
  Top Layer w8: v1(6810,4780) 6860,4730 v1(6860,4390) ; v1(6974.57,4234.57) U81.105@6974.57,4297.32
  Top Layer w12: v1(7740,3960) JP3.2@7800,4020
  Bottom Layer w8: v1(6810,4780) 6870,4840 U80.1@6870,4950 ; v1(6860,4390) 6860,4400 6990,4270 7480,4270 7550,4200 7550,4160 7740,3970 v1(7740,3960) ; v1(6974.57,4234.57) 6974.57,4285.43 ; JP3.2@7780,4020 JP3.2@7800,4020
SDONE: JP3.1 U81.71 | length 507
  Top Layer w12: U81.71@7677.32,4204.8 7734.8,4204.8 7740,4210 7740,4230 7810,4300 7820,4300 7850,4270 7850,4070 JP3.1@7900,4020
SDOUT1: U73.21 U76.3 | length 1551.3
  Top Layer w10: U73.21@6251.42,6579.21 6329.21,6579.21 v1(6350,6600) ; U76.3@6464.68,5415 6395,5415 6370,5440 6370,5510 6500,5640 6500,6040 6408,6132 6408,6298 6470,6360 v1(6470,6490)
  Bottom Layer w8: v1(6350,6600) 6370,6600 6470,6500 v1(6470,6490)
SDOUT2: U72.21 U76.4 | length 697.8
  Top Layer w10: U72.21@6251.42,5799.21 6329.21,5799.21 v1(6340,5810) ; v1(6395,5365) U76.4@6464.68,5365
  Bottom Layer w8: v1(6340,5810) 6370,5810 6410,5770 6410,5620 6350,5560 6350,5410 v1(6395,5365)
SDOUT3: U71.21 U76.5 | length 519.6
  Top Layer w10: U71.21@6251.42,5019.21 v1(6329.21,5019.21) ; v1(6340,5260) 6395,5315 U76.5@6464.68,5315
  Bottom Layer w8: v1(6329.21,5019.21) 6270,5078.42 6270,5130 6340,5200 v1(6340,5260)
SDOUT4: U70.21 U76.6 | length 1354.1
  Top Layer w10: U70.21@6251.42,4239.21 6349.21,4239.21 v1(6370,4260) ; v1(6440,5040) 6450,5050 6450,5090 6400,5140 6400,5250 6415,5265 U76.6@6464.68,5265
  Bottom Layer w8: v1(6370,4260) 6320,4260 6270,4310 6270,4750 6370,4850 6370,4920 6440,4990 v1(6440,5040)
SDOUT5: U69.21 U75.3 | length 1782.5
  Top Layer w10: U69.21@6251.42,3459.21 6319.21,3459.21 6350,3490 6350,3530 6260,3620 6260,3815.96 6520,4075.96 6520,4370 6390,4500 v1(6390,4580) ; v1(6320,4710) 6320,4700 6354.35,4734.35 6394.35,4734.35 6435,4775 U75.3@6464.68,4775
  Bottom Layer w8: v1(6320,4710) 6310,4700 6310,4610 6340,4580 v1(6390,4580)
SERIN2: U47.9 U48.14 | length 830.2
  Top Layer w10: v1(4220,6850) 4256.96,6850 4268.57,6838.39 U48.14@4328.94,6838.39 ; v1(4260,6680) 4310,6630 v1(4350,6630) ; U47.9@4328.94,6320.43 4328.94,6271.06 v1(4330,6270)
  Bottom Layer w8: v1(4220,6850) 4220,6740 4260,6700 v1(4260,6680) ; v1(4330,6270) 4330,6610 v1(4350,6630)
SERIN3: U46.9 U47.14 | length 793.5
  Top Layer w10: v1(4240,6320) 4240,6290 v1(4300,6230) ; v1(4250,6470) 4271.61,6448.39 U47.14@4328.94,6448.39 ; v1@4328.94,5891.06 U46.9@4328.94,5930.43 ; v1(4330,5890) v1@4340,5880
  Bottom Layer w8: v1(4240,6320) 4210,6350 4210,6440 4240,6470 v1(4250,6470) ; v1(4300,6230) 4330,6200 v1(4330,5890)
SERIN4: U45.9 U46.14 | length 780.9
  Top Layer w10: v1(4230,5940) v1(4280,5890) ; v1(4250,6090) 4281.61,6058.39 U46.14@4328.94,6058.39 ; U45.9@4328.94,5540.43 4328.94,5511.06 v1(4330,5510)
  Bottom Layer w8: v1(4230,5940) 4210,5960 4210,6070 4230,6090 v1(4250,6090) ; v1(4280,5890) 4280,5850 4330,5800 v1(4330,5510)
SERIN5: U44.9 U45.14 | length 828.5
  Top Layer w10: v1(4240,5550) 4240,5510 v1(4290,5460) ; v1(4250,5700) 4281.61,5668.39 U45.14@4328.94,5668.39 ; U44.9@4328.94,5150.43 4369.37,5110 v1(4370,5110)
  Bottom Layer w8: v1(4240,5550) 4210,5580 4210,5670 4240,5700 v1(4250,5700) ; v1(4290,5460) 4290,5410 4330,5370 4330,5150 v1(4370,5110)
SERIN6: U43.9 U44.14 | length 804.4
  Top Layer w10: v1(4230,5260) 4248.39,5278.39 U44.14@4328.94,5278.39 ; U43.9@4328.94,4760.43 4330,4759.37 v1(4330,4720)
  Bottom Layer w8: v1(4230,5260) 4260,5260 4290,5230 4290,5140 4330,5100 4330,5040 4400,4970 4400,4940 4330,4870 v1(4330,4720)
SERIN7: U42.9 U43.14 | length 766.8
  Top Layer w10: v1(4220,4740) v1(4280,4680) ; v1(4260,4910) 4281.61,4888.39 U43.14@4328.94,4888.39 ; U42.9@4328.94,4370.43 4328.94,4331.06 v1(4330,4330)
  Bottom Layer w8: v1(4220,4740) 4220,4880 4250,4910 v1(4260,4910) ; v1(4280,4680) 4280,4630 4330,4580 v1(4330,4330)
SERIN8: U41.9 U42.14 | length 1310.1
  Top Layer w10: v1(4110,3910) 4110,3940 4130,3960 4130,4170 4110,4190 4110,4210 4120,4220 4310,4220 v1(4320,4210) ; v1(4220,4380) 4220,4370 v1(4290,4300) ; v1(4250,4530) 4280,4500 U42.14@4330,4500 ; v1(4320,3940) 4328.94,3948.94 U41.9@4328.94,3980.43
  Bottom Layer w8: 4110,3940 4130,3960 4300,3960 v1(4320,3940) ; v1(4220,4380) 4210,4390 4210,4490 v1(4250,4530) ; v1(4290,4300) 4320,4270 v1(4320,4210)
  Bottom Layer w16: v1(4110,3910) 4110,3940
SERIN9: U40.9 U41.14 | length 820.7
  Top Layer w10: v1(4240,3990) 4240,3920 4260,3900 v1(4260,3910) ; v1(4250,4140) 4281.61,4108.39 U41.14@4328.94,4108.39 ; U40.9@4320,3590 4330,3580 v1(4330,3550)
  Bottom Layer w8: v1(4240,3990) 4210,4020 4210,4100 v1(4250,4140) ; v1(4260,3910) 4340,3830 4340,3560 v1(4330,3550)
SERIN10: U39.14 U74.11 | length 3499.3
  Top Layer w10: U39.14@4328.94,3328.39 4268.57,3328.39 4256.96,3340 4250,3340 4230,3360 4230,3400 4250,3420 5130,3420 v1(5150,3440) ; v1(5360,3430) v1(5690,3430) ; v1(6350,3810) 6375,3835 U74.11@6454.69,3835
  Bottom Layer w8: v1(5150,3440) 5190,3440 5230,3480 5310,3480 v1(5360,3430) ; v1(5690,3430) 5730,3390 5730,3170 5790,3110 6360,3110 6430,3180 6430,3420 6320,3530 6320,3600 6350,3630 v1(6350,3810)
SERIN10: U39.9 U40.14 | length 777.6
  Top Layer w10: v1(4220,3610) 4280,3550 v1(4280,3510) ; v1(4250,3740) 4271.61,3718.39 U40.14@4328.94,3718.39 ; v1(4320,3160) 4328.94,3168.94 U39.9@4328.94,3200.43
  Bottom Layer w8: v1(4220,3610) 4220,3730 4230,3740 v1(4250,3740) ; v1(4280,3510) 4320,3470 v1(4320,3160)
SI\N\I\T\: JP3.3 R114.1 U80.3 U81.74 | length 2672.7
  Top Layer w8: U80.3@7070,4960 7070,5060 7220,5210 7220,5260 7270,5310 7270,5330 7290,5350 7320,5350 7370,5400 7500,5400 7540,5360 7540,5280 7710,5110 v1(7710,4480) 7584.8,4354.8 U81.74@7584.8,4297.32
  Top Layer w10: U80.3@7070,4950 7113,4907 7227,4907 7300,4980 R114.1@7300,4982.6
  Bottom Layer w8: v1(7710,4480) 7710,4470 7850,4330 7850,4170 JP3.3@7900,4120
SPROGRAM: JP3.5 U81.73 | length 410.5
  Top Layer w12: U81.73@7604.49,4297.32 7604.49,4304.49 7650,4350 7830,4350 7900,4280 JP3.5@7900,4220
VCC: C92.1 C96.1 C99.1 C215.2 C217.2 C218.2 C219.1 C220.1 C222.1 C224.1 C225.1 C226.1 C230.1 C234.1 C235.1 C236.1 O1.1 O1.8 R114.2 R115.2 R119.2 U74.1 U75.16 U76.16 U80.7 U80.8 U81.17 U81.36 U81.53 U81.72 U81.90 U81.108 U81.128 U81.144 U82.5 U82.6 U83.8 | length 2517.2
  Top Layer w8: U81.144@6842.68,3535.51 6842.68,3527.32 v1(6860,3510) ; U81.128@6842.68,3850.47 6879.53,3850.47 v1(6903.46,3826.54) ; v1(6880,4310) 6902.83,4310 U81.108@6915.51,4297.32 ; v1(6945.32,3325.32) U83.8@6985,3325.32 ; v1(7210,3540) 7230.47,3519.53 U81.17@7230.47,3462.68 ; U81.90@7269.84,4297.32 7269.84,4349.84 v1(7280,4360) ; v1(7600.94,3870) 7620.47,3850.47 U81.53@7677.32,3850.47 ; U81.36@7604.49,3462.68 7604.49,3464.49 v1(7640,3500) ; v1(7610,4200) 7634.49,4224.49 U81.72@7677.32,4224.49 ; R119.2@7830,3427.4 v1(7885.4,3427.4)
  Top Layer w10: v1(7226.6,5057.4) R114.2@7300,5057.4
  Top Layer w12: v1(6870,4770) 6900,4740 C96.1@6900,4678.11 6911.89,4678.11 v1(6940,4650)
  Top Layer w16: U74.1@6665.32,3585 6710,3540.32 v1(6710,3530) ; U75.16@6675.31,4875 6741.93,4875 v1(6743.46,4873.46) ; v1(6680,5570) 6690,5560 U76.16@6690,5520 ; C92.1@6760,5890 v1(6810,5890) ; U82.5@7092.36,5375 7214.06,5375 7229.53,5390.47 C99.1@7230,5390.94 v1(7309.06,5390.94) ; U82.6@7092.36,5425 7195,5425 C99.1@7220,5400 ; v1(7230,5330) C99.1@7230,5390 ; v1(7300,5300) R115.2@7300,5237.4 v1(7397.4,5237.4)
  Top Layer w20: v1(7471.1,3138.9) O1.8@7540,3138.9 ; v1(7480,3320) O1.1@7540,3320
  Bottom Layer w8: C219.1@6820,3533.46 6843.46,3510 v1(6860,3510) ; v1(6880,4310) 6893.46,4296.54 C220.1@6893.46,4260 ; v1(6903.46,3826.54) C222.1@6940,3826.54 ; C225.1@7200,3493.46 7210,3503.46 v1(7210,3540) ; v1(7280,4360) 7293.46,4346.54 C226.1@7293.46,4320 ; C234.1@7600,3493.46 7606.54,3500 v1(7640,3500) ; v1(7600.94,3870) 7636.54,3870 C235.1@7646.54,3880 ; v1(7610,4200) C236.1@7646.54,4200
  Bottom Layer w16: C215.2@6660,3566.54 6673.46,3566.54 v1(6710,3530) ; C217.2@6680,4873.46 v1(6743.46,4873.46) ; C218.2@6680,5513.46 v1(6680,5570) ; C224.1@6918.54,5160 6918.54,5198.54 U80.7@6970,5250 ; v1(7309.06,5390.94) v1@7310,5390 ; C230.1@7440,3186.54 7440,3170 v1(7471.1,3138.9)
pads on no net: JP2.5 JP3.6 POWER-A1.0 POWER-D1.0 u9.7 u9.8 u9.9 u10.7 u10.8 u10.9 U11.1 U11.5 U11.8 U12.1 U12.5 U12.8 U13.1 U13.5 U13.8 U14.1 U14.5 U14.8 U15.1 U15.5 U15.8 U16.1 U16.5 U16.8 U17.1 U17.5 U17.8 U18.1 U18.5 U18.8 U39.7 U39.15 U40.7 U40.15 U41.7 U41.15 U42.15 U45.7 U45.15 U46.7 U46.15 U47.7 U47.15 U48.7 U48.9 U48.15 U59.1 U59.8 U60.1 U60.8 U61.1 U61.8 U62.1 U62.8 U63.1 U63.8 U64.1 U64.8 U65.1 U65.8 U66.1 U66.8 U67.1 U67.8 U68.1 U68.8 U69.9 U69.10 U69.23 U69.24 U69.25 U69.26 U69.27 U69.28 U69.29 U69.30 U70.9 U70.10 U70.23 U70.24 U70.25 U70.26 U70.27 U70.28 U70.29 U70.30 U71.9 U71.10 U71.23 U71.24 U71.25 U71.26 U71.27 U71.28 U71.29 U71.30 U72.9 U72.10 U72.23 U72.24 U72.25 U72.26 U72.27 U72.28 U72.29 U72.30 U73.9 U73.10 U73.23 U73.24 U73.25 U73.26 U73.27 U73.28 U73.29 U73.30 U74.7 U74.10 U75.7 U75.10 U75.13 U76.7 U76.10 U77.3 U77.5 U78.3 U78.5 U79.7 U80.6 U81.2 U81.3 U81.4 U81.5 U81.6 U81.7 U81.8 U81.10 U81.13 U81.14 U81.15 U81.18 U81.20 U81.21 U81.22 U81.23 U81.24 U81.26 U81.27 U81.28 U81.29 U81.30 U81.31 U81.32 U81.38 U81.39 U81.40 U81.41 U81.42 U81.43 U81.44 U81.47 U81.48 U81.49 U81.50 U81.55 U81.56 U81.57 U81.58 U81.59 U81.60 U81.63 U81.64 U81.65 U81.66 U81.67 U81.75 U81.76 U81.77 U81.78 U81.79 U81.80 U81.82 U81.83 U81.84 U81.85 U81.86 U81.87 U81.89 U81.92 U81.93 U81.94 U81.95 U81.96 U81.106 U81.109 U81.111 U81.112 U81.113 U81.117 U81.118 U81.121 U81.122 U81.126 U81.129 U81.131 U81.137 U81.143 U82.7 U84.5
copper on no net: | length 8000
  Top Layer w1: 8000,3000 8000,7000 8000,3000

## Polygon pours and split planes (outlines as drawn)
+5VCC on Bottom Layer (hatched 90Degree grid 8 track 8, remove dead copper): 6832.96,4365 6835,3085 7755,3085 7755,4365
AVSS on Bottom Layer (hatched 90Degree grid 8 track 8, remove dead copper): 7950,6950 2050,6950 2050,3050 6540,3050 6540,6070 7950,6070
+5VCC on Bottom Layer (hatched 90Degree grid 8 track 8, remove dead copper): 6602,3054 7952,3054 7952,6014 6602,6014
+1.8VCC on Bottom Layer (hatched 90Degree grid 8 track 8, remove dead copper): 6950,3100 6850,3100 6850,3490 6850,3656 6848,4350 7740,4350 7740,3367.86 7740,3100
AGND on Internal Plane 1 (split plane): 2020.02,3020.01 2020.02,6979.98 7979.98,6979.98 7979.98,6031.1 ccw(c7960,6030) 7960,6050.02 6570,6050.02 ccw(c6570,6030) 6549.98,6030 6549.98,3040 ccw(c6570,3040) 6568.9,3020.01
GND on Internal Plane 1 (split plane): 6590.02,3060.01 6590.02,6009.98 7939.98,6009.98 7939.98,3060.01
AGND on Internal Plane 1 (split plane): 7961.1,3020.01 ccw(c7960,3040) 7979.98,3038.9 7979.98,3020.01
AVDD on Internal Plane 2 (split plane): 5896.47,3616.44 cw(c5900,3620) 5894.98,3620 5894.98,3700 cw(c5900,3700) 5896.47,3703.56 5896.45,3703.55 5936.45,3743.55 5936.44,3743.53 cw(c5940,3740) 5940,3745.01 5987.92,3745.01 6024.98,3782.08 6024.98,4317.92 5997.92,4344.98 5940,4344.98 cw(c5940,4350) 5936.44,4346.47 5936.45,4346.45 5886.45,4396.45 5886.47,4396.44 cw(c5890,4400) 5884.98,4400 5884.98,4490 cw(c5890,4490) 5886.47,4493.56 5886.45,4493.55 5916.45,4523.55 5916.44,4523.53 cw(c5920,4520) 5920,4525.02 5987.92,4525.02 6014.98,4552.08 6014.98,5087.92 5967.92,5134.98 5920,5134.98 cw(c5920,5140) 5916.44,5136.47 5916.45,5136.45 5896.45,5156.45 5896.47,5156.44 cw(c5900,5160) 5894.98,5160 5894.98,5250 cw(c5900,5250) 5896.47,5253.56 5896.45,5253.55 5936.45,5293.55 5936.44,5293.53 cw(c5940,5290) 5940,5295.02 5987.92,5295.02 6014.98,5322.08 6014.98,5847.92 5947.92,5914.98 5920,5914.98 cw(c5920,5920) 5916.44,5916.47 5916.45,5916.45 5886.45,5946.45 5886.47,5946.44 cw(c5890,5950) 5884.98,5950 5884.98,6040 cw(c5890,6040) 5886.47,6043.56 5886.45,6043.55 5916.45,6073.55 5916.44,6073.53 cw(c5920,6070) 5920,6075.02 5977.92,6075.02 6034.98,6132.08 6034.98,6330 cw(c6040,6330) 6036.47,6333.56 6036.45,6333.55 6076.45,6373.55 6076.44,6373.53 cw(c6080,6370) 6080,6375.02 6397.92,6375.02 6496.45,6473.55 6496.44,6473.53 cw(c6500,6470) 6500,6475.02 6580,6475.02 cw(c6580,6470) 6583.56,6473.53 6583.55,6473.55 6613.55,6443.55 6613.53,6443.56 cw(c6610,6440) 6615.02,6440 6615.02,6330 cw(c6610,6330) 6613.53,6326.44 6613.55,6326.45 6555.02,6267.92 6555.02,6043.27 cw(c6570,6030) 6570,6050.02 7960,6050.02 cw(c7960,6030) 7979.98,6031.1 7979.98,6979.98 2020.02,6979.98 2020.02,3020.01 6568.9,3020.01 cw(c6570,3040) 6550.62,3034.99 6030,3034.99 cw(c6030,3040) 6024.98,3040 6024.98,3537.92 5987.92,3574.99 5940,3574.99 cw(c5940,3580) 5936.44,3576.47 5936.45,3576.45
DVDD on Internal Plane 2 (split plane): 5905.02,3622.08 5942.08,3585.01 5990,3585.01 cw(c5990,3580) 5993.56,3583.53 5993.55,3583.55 6033.55,3543.55 6033.53,3543.56 cw(c6030,3540) 6035.02,3540 6035.02,3045.01 6544.98,3045.01 6544.98,6270 cw(c6550,6270) 6546.47,6273.56 6546.45,6273.55 6604.98,6332.08 6604.98,6437.92 6577.92,6464.98 6502.08,6464.98 6403.55,6366.45 6403.56,6366.47 cw(c6400,6370) 6400,6364.98 6082.08,6364.98 6045.02,6327.92 6045.02,6130 cw(c6040,6130) 6043.53,6126.44 6043.55,6126.45 5983.55,6066.45 5983.56,6066.47 cw(c5980,6070) 5980,6064.98 5922.08,6064.98 5895.02,6037.92 5895.02,5952.08 5922.08,5925.02 5950,5925.02 cw(c5950,5920) 5953.56,5923.53 5953.55,5923.55 6023.55,5853.55 6023.53,5853.56 cw(c6020,5850) 6025.02,5850 6025.02,5320 cw(c6020,5320) 6023.53,5316.44 6023.55,5316.45 5993.55,5286.45 5993.56,5286.47 cw(c5990,5290) 5990,5284.98 5942.08,5284.98 5905.02,5247.92 5905.02,5162.08 5922.08,5145.02 5970,5145.02 cw(c5970,5140) 5973.56,5143.53 5973.55,5143.55 6023.55,5093.55 6023.53,5093.56 cw(c6020,5090) 6025.02,5090 6025.02,4550 cw(c6020,4550) 6023.53,4546.44 6023.55,4546.45 5993.55,4516.45 5993.56,4516.47 cw(c5990,4520) 5990,4514.98 5922.08,4514.98 5895.02,4487.92 5895.02,4402.08 5942.08,4355.02 6000,4355.02 cw(c6000,4350) 6003.56,4353.53 6003.55,4353.55 6033.55,4323.55 6033.53,4323.56 cw(c6030,4320) 6035.02,4320 6035.02,3780 cw(c6030,3780) 6033.53,3776.44 6033.55,3776.45 5993.55,3736.45 5993.56,3736.47 cw(c5990,3740) 5990,3734.99 5942.08,3734.99 5905.02,3697.92
AVDD on Internal Plane 2 (split plane): 6571.1,3020.01 ccw(c6570,3040) 6575,3020.62 ccw(c6580,3040) 6578.9,3020.01
AVDD on Internal Plane 2 (split plane): 7961.1,3020.01 7979.98,3020.01 7979.98,3038.9 cw(c7960,3040)
VCC on Internal Plane 2 (split plane): 6590.02,3060.01 7939.98,3060.01 7939.98,6009.98 6590.02,6009.98

## Keep-outs
Keep-Out Layer:
  lines w10: 2050,3050 7950,3050 7950,6950 2050,6950 2050,3050

## Other copper
Top Layer:
  rectangle net NetC42.AA1_1: 5520,6590 5660,6600
  rectangle net NetC42.AA1_1: 5657.2,6590 5670,6800
  rectangle net NetC42.AA1_1: 5657.2,6790 5670,6880
  rectangle net NetC42.AA1_1: 5470,6590 5670,6610
  rectangle net NetC42.AA2_1: 5520,6200 5660,6210
  rectangle net NetC42.AA2_1: 5470,6200 5670,6220
  rectangle net NetC42.AA2_1: 5657.2,6200 5670,6410
  rectangle net NetC42.AA2_1: 5657.2,6400 5670,6490
  rectangle net NetC42.AA3_1: 5520,5810 5660,5820
  rectangle net NetC42.AA3_1: 5470,5810 5670,5830
  rectangle net NetC42.AA3_1: 5657.2,5810 5670,6020
  rectangle net NetC42.AA3_1: 5657.2,6010 5670,6100
  rectangle net NetC42.AA4_1: 5520,5420 5660,5430
  rectangle net NetC42.AA4_1: 5470,5420 5670,5440
  rectangle net NetC42.AA4_1: 5657.2,5420 5670,5630
  rectangle net NetC42.AA4_1: 5657.2,5620 5670,5710
  rectangle net NetC42.AA5_1: 5657.2,5030 5670,5240
  rectangle net NetC42.AA5_1: 5657.2,5230 5670,5320
  rectangle net NetC42.AA6_1: 5520,4640 5660,4650
  rectangle net NetC42.AA6_1: 5470,4640 5670,4660
  rectangle net NetC42.AA6_1: 5657.2,4640 5670,4850
  rectangle net NetC42.AA6_1: 5657.2,4840 5670,4930
  rectangle net NetC42.AA7_1: 5520,4250 5660,4260
  rectangle net NetC42.AA7_1: 5470,4250 5670,4270
  rectangle net NetC42.AA7_1: 5657.2,4250 5670,4460
  rectangle net NetC42.AA7_1: 5657.2,4450 5670,4540
  rectangle net NetC42.AA8_1: 5520,3860 5660,3870
  rectangle net NetC42.AA8_1: 5470,3860 5670,3880
  rectangle net NetC42.AA8_1: 5657.2,3860 5670,4070
  rectangle net NetC42.AA8_1: 5657.2,4060 5670,4150
  rectangle net NetC42.AA9_1: 5470,3470 5670,3490
  rectangle net NetC42.AA9_1: 5657.2,3470 5670,3680
  rectangle net NetC42.AA9_1: 5657.2,3670 5670,3760
  rectangle net NetC42.AA10_1: 5520,3080 5660,3090
  rectangle net NetC42.AA10_1: 5470,3080 5670,3100
  rectangle net NetC42.AA10_1: 5657.2,3080 5670,3290
  rectangle net NetC42.AA10_1: 5657.2,3280 5670,3370
  text "LAYER 1" at 8230,4240 h60
Bottom Layer:
  text "LAYER 4" at 8230,3910 h60
Internal Plane 1 (plane layer: these items are gaps in the copper):
  lines w40: 6570,3040 6570,3060 6570,6030 7960,6030 7960,3040 6570,3040
  text "LAYER 2" at 8230,4130 h60
Internal Plane 2 (plane layer: these items are gaps in the copper):
  lines w10: 4280,5670 4320,5670 ; 6550,3040 6550,6270 6610,6330 6610,6440 6580,6470 6500,6470 6400,6370 6080,6370 6040,6330 6040,6130 5980,6070 5920,6070 5890,6040 5890,5950 5920,5920 5950,5920 6020,5850 6020,5320 5990,5290 5940,5290 5900,5250 5900,5160 5920,5140 5970,5140 6020,5090 6020,4550 5990,4520 5920,4520 5890,4490 5890,4400 5940,4350 6000,4350 6030,4320 6030,3780 5990,3740 5940,3740 5900,3700 5900,3620 5940,3580 5990,3580 6030,3540 6030,3040 6570,3040
  lines w40: 6570,3040 6570,6020 ; 6570,6030 7960,6030 7960,3040 6580,3040
  text "LAYER 3" at 8230,4030 h60

## Silkscreen, mask and mechanical layers (free items; w line width, h text height)
Top Overlay:
  the board outline again, w1
  text "ver 3.0" at 2170,4200 h20 r90
  text "PCLM, MIT" at 2210,4120 h25 r90
  text "SOMA Acquisition Board" at 2120,3070 h60 r90
  text "Copyright Eric Jonas 2002-2003" at 2170,3070 h30 r90
  text "Wilson Lab" at 2210,3070 h25 r90
Top Solder:
  the board outline again, w1
Horizontal Markers:
  lines w10: 2050,3440 7950,3440 ; 2050,3830 7950,3830 ; 2050,4220 7950,4220 ; 2050,5000 7950,5000 ; 2050,5390 7950,5390 ; 2050,5770 7960,5770 ; 2050,6170 7950,6170 ; 2050,6560 7950,6560 ; 2060,4610 7950,4610
Mechanical 8:
  lines w10: 6570,3050 6570,6020 6580,6030 6600,6030 7950,6030
Drill Drawing:
  lines w10: 6050,3110 6070,3110
  text ".LEGEND" at 8210,3330 h60
  text "Drill Drawing." at 8200,3100 h60

## Dimensions
2050,3050 to 7950,3050 on Mechanical 1
2050,3050 to 2050,6950 on Mechanical 1

## Text inside footprints (layer, text, board x,y; h text height)
JP1: Top Overlay "20" at 2180,4495 h50 r270; Top Overlay "19" at 2080,4495 h50 r270; Top Overlay "1" at 2080,5555 h50 r270; Top Overlay "2" at 2180,5555 h50 r270
JP2: Top Overlay "6" at 7820,3840 h50 r90; Top Overlay "5" at 7920,3840 h50 r90; Top Overlay "2" at 7820,3480 h50 r90; Top Overlay "1" at 7920,3500 h50 r90
JP3: Top Overlay "6" at 7820,4280 h50 r90; Top Overlay "5" at 7920,4280 h50 r90; Top Overlay "2" at 7820,3920 h50 r90; Top Overlay "1" at 7920,3940 h50 r90